# Altium PCB PCBV2.PcbDoc
Units mm, origin at the board's own origin, x right, y up, seen from the top; angles counter-clockwise.
Board outline 25 x 50 mm, 2 copper layers (Top Layer, Bottom Layer); 35 components, 30 nets, 130 pads, 10 vias.
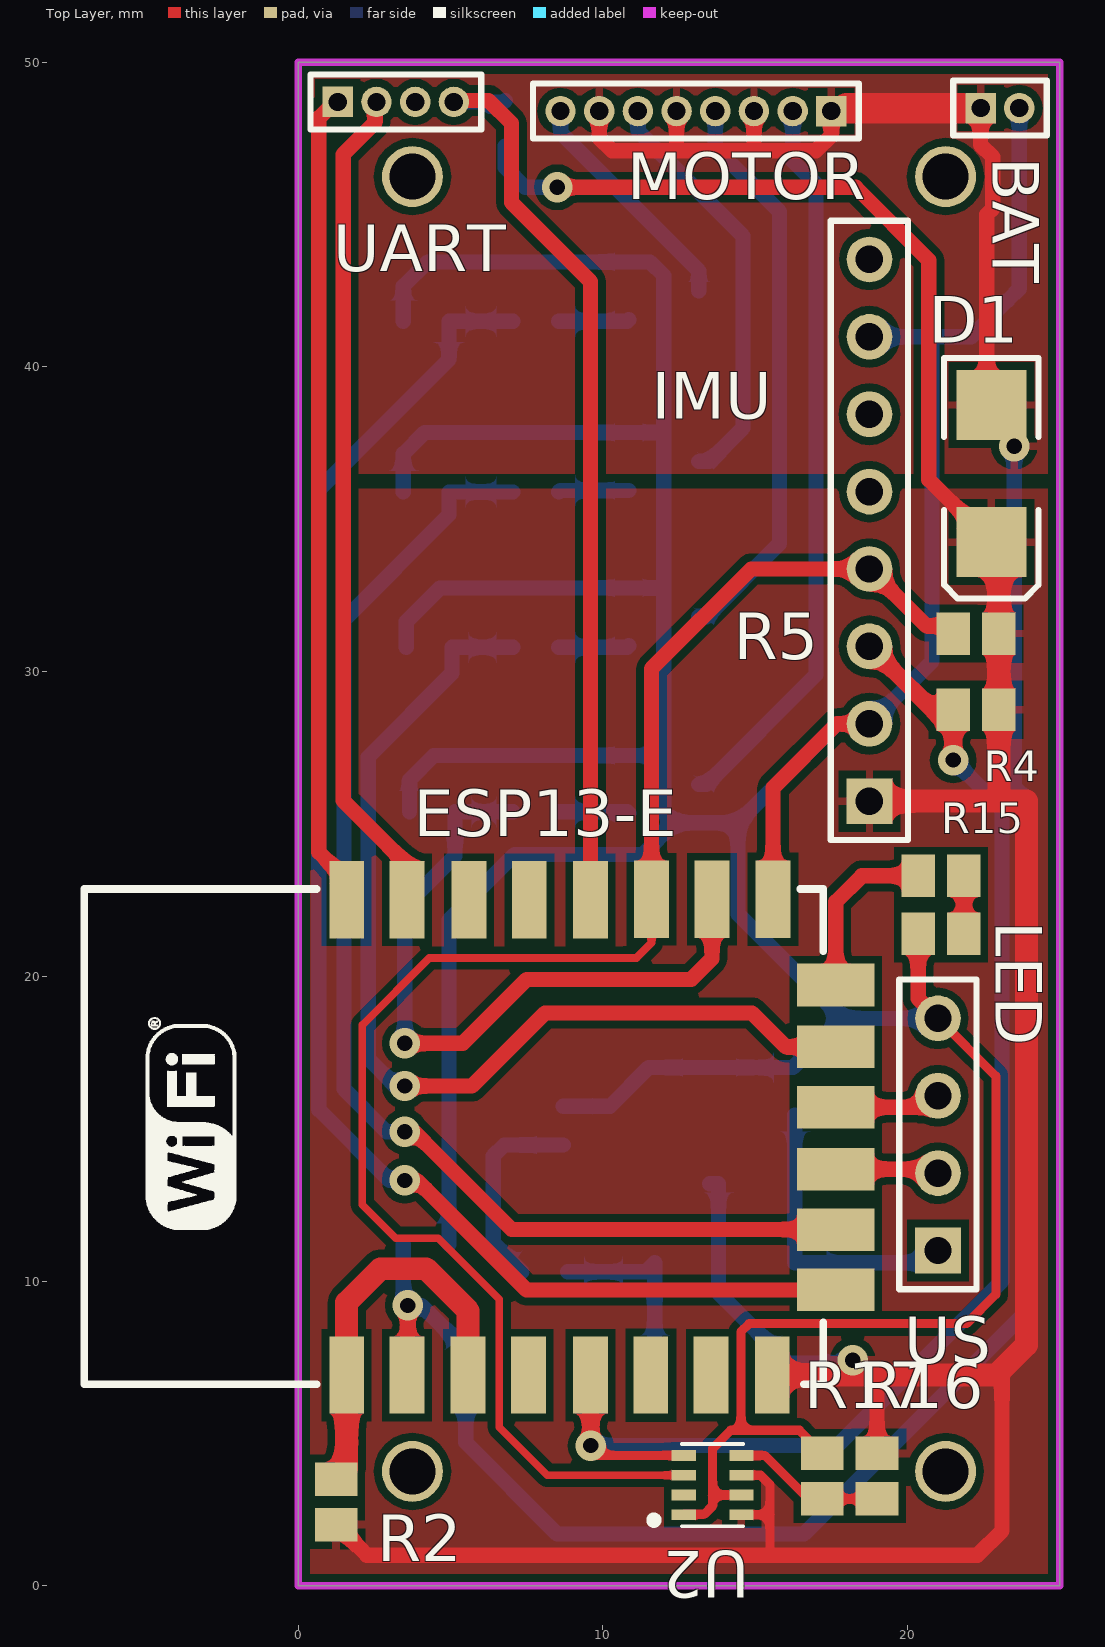
[diagram p0: Top Layer view]
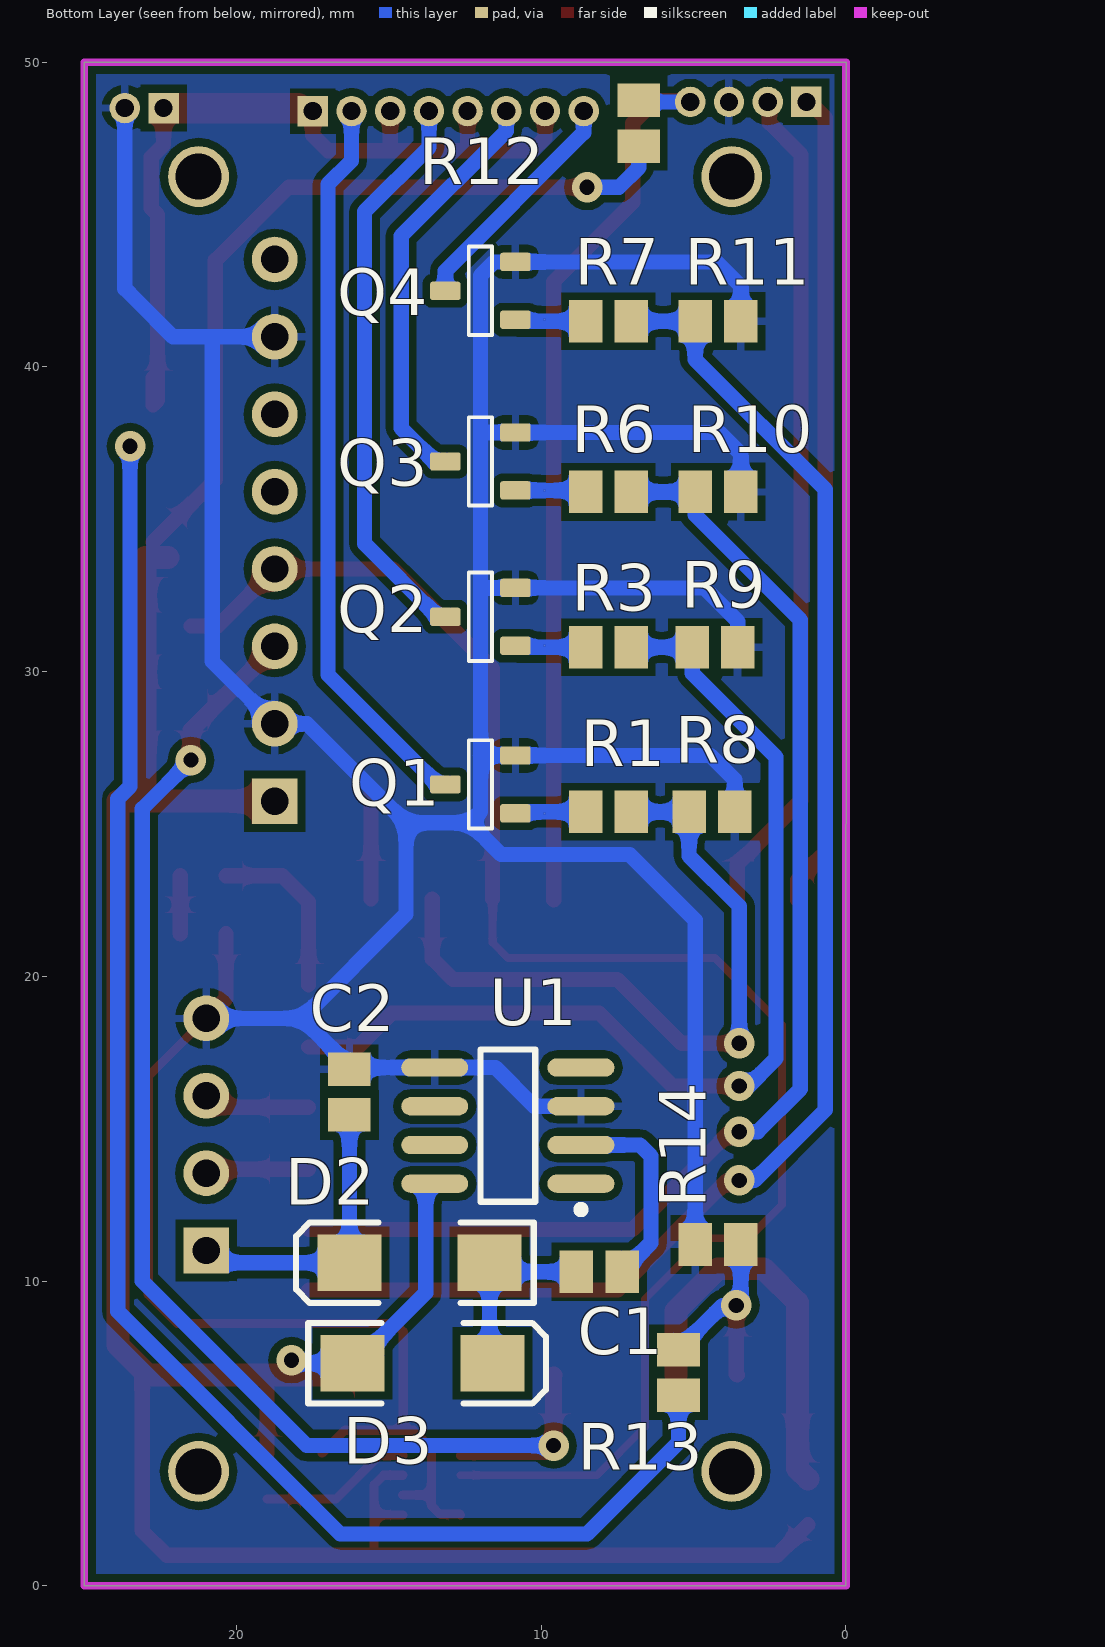
[diagram p1: Bottom Layer view, seen from below]

## Layer stack, top to bottom
Top Solder: solder mask 0.0102, Solder Resist, Dk 3.5
Top Layer: signal copper 0.0356
Dielectric 1: dielectric 0.32, FR-4, Dk 4.8
Bottom Layer: signal copper 0.0356
Bottom Solder: solder mask 0.0102, Solder Resist, Dk 3.5

## Board outline
0,0 25,0 25,50 0,50

## Design rules (kind name [scope] priority, off if disabled: settings)
Clearance [All] p1: gap=0.256
PolygonConnect [All] p1: connectstyle=Relief reliefconductorwidth=0.254 reliefentries=4 polygonreliefangle="90 Angle" airgapwidth=0.254
RoutingVias [All] p1: holewidth=0.711 width=1.27 viastyle="Through Hole" minholewidth=0.711 minwidth=1.27 maxholewidth=0.711 maxwidth=1.27
SolderMaskExpansion [All] p1: expansion=0.102
Width [All] p1: maxlimit=2 minlimit=0.256 preferedwidth=0.5
30 further rules are at their usual default settings.

## Components (designator, comment, footprint, x,y, rotation, side; value= is the part's Value field where it differs from the comment)
BAT "Header 2" MHDR1X2 22.4,48.5 r0 top (schematic designator P1)
C1 "Cap" C0805 8.1,10.3 r0 bottom
C2 "Cap" C0805 16.3,16.2 r270 bottom
D1 "Diode 1N5402" DSO-C2/X2.3 22.75,36.5 r270 top
D2 "Diode 1N5402" DSO-C2/Z6.7 14,10.6 r0 bottom
D3 "Diode 1N5402" DSO-C2/Z6.7 13.9,7.3 r180 bottom
ESP13-E "ESP8266 ESP-12-E" "ESP8266 ESP-12-E B" 18,23.5 r90 top (schematic designator IC1)
IMU "Header 8" HDR1X8 18.75,25.75 r90 top (schematic designator P5)
LED "LED3" C0805 21.1,21.4 r180 top (schematic designator D4)
MOTOR "MHDR1X8" MHDR1X8 17.5,48.4 r180 top (schematic designator P3)
Q1 "MOSFET-N" SOT23-3 12,26.3 r0 bottom
Q2 "MOSFET-N" SOT23-3 12,31.8 r0 bottom
Q3 "MOSFET-N" SOT23-3 12,36.9 r0 bottom
Q4 "MOSFET-N" SOT23-3 12,42.5 r0 bottom
R1 "Res3" C0805 7.8,25.4 r0 bottom
R2 "Res3" C0805 1.25,2.75 r90 top
R3 "Res3" C0805 7.8,30.8 r0 bottom
R4 "Res3" C0805 22.25,28.75 r0 top
R5 "Res3" C0805 22.25,31.25 r0 top
R6 "Res3" C0805 7.8,35.9 r0 bottom
R7 "Res3" C0805 7.8,41.5 r0 bottom
R8 "Res3" C0805 4.4,25.4 r180 bottom
R9 "Res3" C0805 4.3,30.8 r180 bottom
R10 "Res3" C0805 4.2,35.9 r180 bottom
R11 "Res3" C0805 4.2,41.5 r180 bottom
R12 "Res3" C0805 6.8,48 r90 bottom
R13 "Res3" C0805 5.5,7 r90 bottom
R14 "Res3" C0805 4.2,11.2 r0 bottom
R15 "Res3" C0805 21.1,23.3 r0 top
R16 "Res3" C0805 19,3.6 r90 top
R17 "Res3" C0805 17.2,3.6 r90 top
U1 "LMC7660IM" M08A_N 11.1,15.1 r0 bottom
U2 "BMP280" LGA-8_BMP280(Primary) 13.6,3.3 r180 top
UART "MHDR1X4" MHDR1X4 1.3,48.7 r0 top (schematic designator P2)
US "Header 4" HDR1X4 21,11 r90 top (schematic designator P4)

## Footprints (in the part's own frame and the unit in brackets; to place one, negate y for a bottom-side part, rotate by r counter-clockwise, add the part's x,y. Pads: shape width x height; smd on the part's side, far side on the other; paste and mask are expansions set on the pad)
C0805 [mm] "Chip Capacitor, Body 2.0x1.3mm, IPC High Density"
  rect 1.1x1.4 smd: 1(-0.75,0) 2(0.75,0)
  body extent -1.1,-0.72 1.1,0.72, height 1.4
DSO-C2/X2.3 [mm] "DO-214-AA/SMB; 2 C-Bend Leads; Body 5.3 x 3.6 mm, inc. leads (LxW)"
  rect 2.3x2.3 smd: 1(-2.25,0) 2(2.25,0)
  silkscreen extent -3.8,-1.55 4.1,1.55
DSO-C2/Z6.7 [mm] "DO-214-AC/SMA; 2 C-Bend Leads; Body 5.3 x 2.6 mm, inc. leads (LxW)"
  rect 2.1x1.85 smd: 1(-2.3,0) 2(2.3,0)
  silkscreen extent -3.75,-1.33 4.05,1.33
"ESP8266 ESP-12-E B" [mil] "ESP8266 ESP-12-E"
  rect 100x45 smd: 1(-653,646) 2(-653,568) 3(-653,489) 4(-653,411) 5(-653,331) 6(-653,253) 7(-653,175) 8(-653,96) 15(-38,95) 16(-38,174) 17(-38,252) 18(-39,331) 19(-39,410) 20(-39,488) 21(-39,568) 22(-39,646)
  rect 55x100 smd: 9(-543,14) 10(-465,14) 11(-387,14) 12(-307,14) 13(-229,14) 14(-149,14)
  silkscreen extent -665,30 -25,985
HDR1X4 [mm] "Connector; Header; 4 Position"
  rect 1.5x1.5 hole 0.9: 1(0,0)
  round 1.5 hole 0.9: 2(2.54,0) 3(5.08,0) 4(7.62,0)
  silkscreen extent -1.27,-1.27 8.89,1.27
HDR1X8 [mm] "Connector; Header; 8 Position"
  rect 1.5x1.5 hole 0.9: 1(0,0)
  round 1.5 hole 0.9: 2(2.54,0) 3(5.08,0) 4(7.62,0) 5(10.16,0) 6(12.7,0) 7(15.24,0) 8(17.78,0)
  silkscreen extent -1.27,-1.27 19.05,1.27
LGA-8_BMP280(Primary) [mm]
  rect 0.8x0.35 smd paste-25.4 mask-25.4: 1(0.95,0.975) 2(0.95,0.325) 3(0.95,-0.325) 4(0.95,-0.975) 5(-0.95,-0.975) 6(-0.95,-0.325) 7(-0.95,0.325) 8(-0.95,0.975)
  silkscreen extent -1,-1.35 2.02,1.35
M08A_N [mm] "SOIC, 8-Leads, Body 4.9x3.9mm, Pitch 1.27mm, IPC Medium Density"
  oval 2.2x0.6 smd: 1(-2.4,1.905) 2(-2.4,0.635) 3(-2.4,-0.635) 4(-2.4,-1.905) 5(2.4,-1.905) 6(2.4,-0.635) 7(2.4,0.635) 8(2.4,1.905)
  silkscreen extent -2.52,-2.5 0.9,2.88, body extent -2,-2.5 2,2.5, height 1.75
MHDR1X2 [mm] "Connector; Header; 2 Position"
  rect 1x1 hole 0.6: 1(0,0)
  round 1 hole 0.6: 2(1.27,0)
  silkscreen extent -0.9,-0.9 2.17,0.9
MHDR1X4 [mm] "Connector; Header; 4 Position"
  rect 1x1 hole 0.6: 1(0,0)
  round 1 hole 0.6: 2(1.27,0) 3(2.54,0) 4(3.81,0)
  silkscreen extent -0.9,-0.9 4.71,0.9
MHDR1X8 [mm] "Connector; Header; 8 Position"
  rect 1x1 hole 0.6: 1(0,0)
  round 1 hole 0.6: 2(1.27,0) 3(2.54,0) 4(3.81,0) 5(5.08,0) 6(6.35,0) 7(7.62,0) 8(8.89,0)
  silkscreen extent -0.9,-0.9 9.79,0.9
SOT23-3 [mm] "SOT23, 3 pin"
  round 0.5 on Mech15: 0(0,0)
  rrect25% 1x0.6 smd: 1(-1.15,0.95) 2(-1.15,-0.95) 3(1.15,0)
  silkscreen extent -0.38,-1.45 0.38,1.45, body extent -1.4,-1.45 1.4,1.45, height 1.29

## Part data
BAT: "Header, 2-Pin"
C1 C2: "Capacitor"
D1 D2 D3: "3 Amp General Purpose Rectifier"
IMU MOTOR: "Header, 8-Pin"
LED: "Typical BLUE SiC LED"
Q1 Q2 Q3 Q4: "N-Channel MOSFET"
R1 R2 R3 R4 R5 R6 R7 R8 R9 R10 R11 R12 R13 R14 R15 R16 R17: "Resistor"
U1: "Switched Capacitor Voltage Converter, 8-pin Narrow SOIC"
U2: "Barometro"
UART US: "Header, 4-Pin"

## Free pads (board coordinates)
  round 2 hole 1.5: 1(3.75,46.25) 2(21.25,46.25) 3(21.25,3.75) 4(3.75,3.75)

## Via types
v1: diameter 1, hole 0.5, Top Layer to Bottom Layer, 10 vias

## Nets (pads, with @x,y where several pads share a name; then routed paths per layer and width w, separated by ;. In a path a pad name is that pad's centre, name@x,y a point inside that pad or via, vN(x,y) a via of type N, cw(c..) or ccw(c..) an arc to the next point about the centre after c; other vN are vias at no path point)
5VCC: C2.2 D2.2 US.1 | length 9.7
  Bottom Layer w0.5: C2.2 D2.2 20.6,10.6 US.1
ADC: ESP13-E.2 R13.2 R14.1 | length 6.9
  Top Layer w0.5: ESP13-E.2 3.6,6.941 v1(3.6,9.2)
  Bottom Layer w0.5: R14.1 3.45,9.35 v1(3.6,9.2) 4.05,9.2 R13.2
BOOT: ESP13-E.18 R12.2 UART.4 | length 30.8
  Top Layer w0.5: UART.4@5.06,48.75 6.25,48.75 7,48 7,45.4 9.593,42.807 ESP13-E.18
  Bottom Layer w0.5: UART.4 R12.2@6.15,48.7 ; R12.2@6.125,48.725 R12.2@6.15,48.7 ; R12.2@6.3,48.55 R12.2@6.15,48.7 ; R12.2 6.75,48.7 R12.2@6.15,48.7
ECHO: ESP13-E.12 US.3 | length 3.5
  Top Layer w0.5: ESP13-E.12 20.622,15.702 US.3
GND: BAT.2 C2.1 ESP13-E.15 IMU.2 IMU.7 LED.2 Q1.2 Q2.2 Q3.2 Q4.2 R8.2 R9.2 R10.2 R11.2 R14.2 R17.2 U1.3 U1.5 U2.1 U2.7 UART.3 US.4 | length 172.5
  Top Layer w0.3: U2.1 12.675,2.35 13.336,2.35 13.6,2.614 13.6,4.5 14.2,5.1 16.45,5.1 R17.2 ; 13.6,2.975 U2.7 ; 14.532,5.1 14.532,8.333 14.803,8.603 21.937,8.603 22.9,9.567 22.9,16.72 US.4
  Top Layer w0.5: ESP13-E.15 15.587,26.187 17.69,28.29 IMU.2 ; LED.2 20.35,19.27 US.4
  Bottom Layer w0.5: R10.2 3.45,37.15 4.15,37.85 Q3.2 11.95,37.85 12,37.9 ; R11.2 3.45,42.65 4.25,43.45 Q4.2 11.55,43.45 12,43 12,37.9 ; R9.2 3.55,31.65 4.65,32.75 Q2.2 11.95,32.75 12,32.8 ; R8.2 3.65,26.45 4.45,27.25 Q1.2 12,27.25 ; R14.2 4.95,21.85 7.1,24 11.32,24 12.36,25.04 ; U1.3 10.235,15.735 11.505,17.005 U1.5 16.245,17.005 17.86,18.62 ; IMU.7@18.56,40.8 IMU.7 20.7,40.99 ; US.4 17.86,18.62 ; BAT.2 23.67,42.57 23.29,42.19 22.09,40.99 20.7,40.99 ; 12,27.25 12,32.8 ; 12,27.25 12,25.4 12.36,25.04 ; 12,32.8 12,37.9 ; 12.36,25.04 14.44,25.04 ; 14.44,25.04 14.44,22.04 17.86,18.62 ; 14.44,25.04 17.69,28.29 IMU.2 20.8,30.34 20.8,40.89 20.7,40.99
I2C_SCL: ESP13-E.5 IMU.3 R4.1 U2.4 | length 43.9
  Top Layer w0.3: v1(9.6,4.6) 9.925,4.275 U2.4
  Top Layer w0.56: ESP13-E.5 9.6,6.906 v1(9.6,4.6) ; IMU.3 21.5,28.08 v1(21.5,27.1)
  Bottom Layer w0.5: v1(9.6,4.6) 17.7,4.6 23.1,10 23.1,25.5 v1(21.5,27.1)
I2C_SDA: ESP13-E.17 IMU.4 R5.1 U2.3 | length 54.2
  Top Layer w0.256: ESP13-E.17 11.599,21.099 11.1,20.6 4.3,20.6 2.1,18.4 2.1,12.5 3.2,11.4 4.6,11.4 6.6,9.4 6.6,5.2 8.175,3.625 U2.3
  Top Layer w0.5: ESP13-E.17 11.599,30.099 14.87,33.37 IMU.4 20.62,31.5 R5.1@21.5,31.5
LED: ESP13-E.14 R15.1 | length 5.8
  Top Layer w0.5: ESP13-E.14 17.644,22.444 18.5,23.3 R15.1
NetC1_1: C1.1 U1.2 | length 6.6
  Bottom Layer w0.5: C1.1 6.4,11.25 6.4,14.1 6.765,14.465 U1.2
NetC1_2: C1.2 D2.1 D3.2 | length 6.3
  Bottom Layer w0.5: C1.2 11.4,10.3 D2.1 11.7,7.4 D3.2
NetESP13-E_1: ESP13-E.1 ESP13-E.3 R2.2 | length 13.1
  Top Layer w0.75: R2.2 1.592,3.842 ESP13-E.1 1.592,9.292 2.7,10.4 4.2,10.4 5.579,9.021 ESP13-E.3
NetLED_1: LED.1 R15.2 | length 1.9
  Top Layer w0.5: LED.1 R15.2
NetMOTOR_2: MOTOR.2 Q1.3 | length 24.3
  Bottom Layer w0.5: Q1.3 13.4,26.3 17,29.9 17,46 16.23,46.77 MOTOR.2@16.23,48.5
NetMOTOR_4: MOTOR.4 Q2.3 | length 18.8
  Bottom Layer w0.5: Q2.3 13.4,31.8 15.8,34.2 15.8,45.1 13.69,47.21 MOTOR.4@13.69,48.5
NetMOTOR_6: MOTOR.6 Q3.3 | length 13.8
  Bottom Layer w0.5: MOTOR.6@11.15,48.5 11.15,47.75 14.6,44.3 14.6,38 13.5,36.9 Q3.3
NetMOTOR_8: MOTOR.8 Q4.3 | length 7.9
  Bottom Layer w0.5: MOTOR.8@8.61,48.5 8.61,47.69 13.15,43.15 Q4.3
NetQ1_2: Q1.1 R1.2 | length 2.3
  Bottom Layer w0.5: R1.2 10.8,25.4 Q1.1
NetQ2_2: Q2.1 R3.2 | length 2.3
  Bottom Layer w0.5: R3.2 10.8,30.8 Q2.1
NetQ3_2: Q3.1 R6.2 | length 2.3
  Bottom Layer w0.5: R6.2 8.6,35.95 Q3.1
NetQ4_2: Q4.1 R7.2 | length 2.3
  Bottom Layer w0.5: R7.2 10.8,41.5 Q4.1
NetR16_1: R16.1 R17.1 U2.5 | length 5
  Top Layer w0.3: U2.5 15.311,4.275 16.736,2.85 R17.1 R16.1
PWM0: ESP13-E.16 R1.1 R8.1 | length 23.4
  Top Layer w0.5: v1(3.5,17.8) 5.4,17.8 7.5,19.9 12.9,19.9 13.58,20.58 ESP13-E.16
  Bottom Layer w0.5: v1(3.5,17.8) 3.5,22.3 5.15,23.95 R8.1 R1.1
PWM1: ESP13-E.13 R3.1 R9.1 | length 33.8
  Top Layer w0.5: v1(3.5,16.4) 5.7,16.4 8.1,18.8 14.9,18.8 16.017,17.683 ESP13-E.13
  Bottom Layer w0.5: v1(3.5,16.4) 3.2,16.4 2.3,17.3 2.3,27.2 5.05,29.95 R9.1 R3.1
PWM2: ESP13-E.10 R6.1 R10.1 | length 41.2
  Top Layer w0.5: v1(3.5,14.9) 3.8,14.9 7.011,11.689 ESP13-E.10
  Bottom Layer w0.5: v1(3.5,14.9) 2.9,14.9 1.5,16.3 1.5,31.7 4.95,35.15 R10.1 R6.1
PWM3: ESP13-E.9 R7.1 R11.1 | length 49.2
  Top Layer w0.5: v1(3.5,13.3) 3.9,13.3 7.492,9.708 ESP13-E.9
  Bottom Layer w0.5: v1(3.5,13.3) 3,13.3 0.678,15.622 0.678,35.978 4.95,40.25 R11.1 R7.1
RX: ESP13-E.21 UART.2 | length 27.5
  Top Layer w0.5: UART.2@2.52,48.75 2.52,48.02 1.478,46.978 1.478,25.772 3.573,23.677 ESP13-E.21
TRIGER: ESP13-E.11 US.2 | length 3.4
  Top Layer w0.5: ESP13-E.11 20.87,13.67 US.2
TX: ESP13-E.22 UART.1 | length 26.9
  Top Layer w0.5: UART.1@1.25,48.75 0.678,48.178 0.678,24.072 1.592,23.158 ESP13-E.22
VCC: D1.2 D3.1 ESP13-E.8 IMU.1 R2.1 R4.2 R5.2 R12.1 R16.2 U1.8 U2.6 U2.8 | length 110.1
  Top Layer w0.3: U2.8 15.487,2.325 ; U2.6 15.175,3.625 15.487,3.313 15.487,2.325 ; 15.4,1 15.487,1.087 15.487,2.325
  Top Layer w0.5: R2.1 2.25,1 15.4,1 22.3,1 23.1,1.8 23.1,7.1 ; v1(8.5,45.9) 18.3,45.9 20.7,43.5 20.7,36.3 D1.2 ; 18.9,6.914 19,6.814 R16.2
  Top Layer w0.75: ESP13-E.8 18.9,6.914 22.914,6.914 23.9,7.9 23.9,25.75 IMU.1 ; D1.2@22.25,33.75 23,33.75 23,25.9
  Bottom Layer w0.5: R12.1 6.8,46.55 7.45,45.9 v1(8.5,45.9) ; U1.8 13.795,13.195 13.795,9.605 16.1,7.3 D3.1 17.8,7.3 v1@17.8,7.4
  other v1: 18.2,7.4
VCC_BAT: BAT.1 D1.1 MOTOR.1 MOTOR.3 MOTOR.5 MOTOR.7 R13.1 | length 80.3
  Top Layer w0.5: MOTOR.7@9.88,48.5 9.88,47.52 10.3,47.1 12.4,47.1 ; MOTOR.5@12.42,48.5 12.42,47.12 12.4,47.1 ; MOTOR.3@14.96,48.5 14.96,47.16 14.9,47.1 ; MOTOR.1@17.5,48.5 17.5,47.6 17,47.1 14.9,47.1 ; BAT.1 22.4,47.292 22.8,46.892 22.8,45.208 22.6,45.008 22.6,38.9 D1.1 D1.1@22.75,39.65 ; 12.4,47.1 14.9,47.1
  Top Layer w1: MOTOR.1@18,48.5 21.8,48.5
  Bottom Layer w0.5: R13.1 5.5,4.7 8.5,1.7 16.6,1.7 23.9,9 23.9,25.831 23.5,26.231 v1(23.5,37.4)
pads on no net: ESP13-E.4 ESP13-E.6 ESP13-E.7 ESP13-E.19 ESP13-E.20 IMU.5 IMU.6 IMU.8 Q1.0 Q2.0 Q3.0 Q4.0 U1.1 U1.4 U1.6 U1.7 U2.2

## Polygon pours and split planes (outlines as drawn)
GND on Bottom Layer "Plano_GND" (solid, pour order 12): 0,50 25,50 25,0 0,0
VCC_BAT on Top Layer "Plano_VCC_BAT" (solid, pour order 14): 0,50 25,50 25,36.5 0,36.5
VCC on Top Layer "Plano_VCC" (solid, pour order 20): 25,36 25,0 0,0 0,36

## Keep-outs
Keep-Out Layer:
  the board outline again, w0.256

## Text inside footprints (layer, text, board x,y; h text height)
ESP13-E: Mechanical 13 "ANTENNA AREA" at -6.399,6.915 h0.25 r90; Mechanical 13 "CUTOUT POLYGON" at -5.891,6.915 h0.25 r90